# Altium PCB TransceiverBoard.PcbDoc (part 1 of 2)
Units mm, origin at the board's own origin, x right, y up, seen from the top; angles counter-clockwise.
Board outline 152.4 x 101.6 mm, 4 copper layers (Top Layer, Layer 2, Layer 1, Bottom Layer), stack 1.57 mm thick; 106 components, 66 nets, 334 pads, 4 vias.
Unrouted connection lines stored in the file: 243.
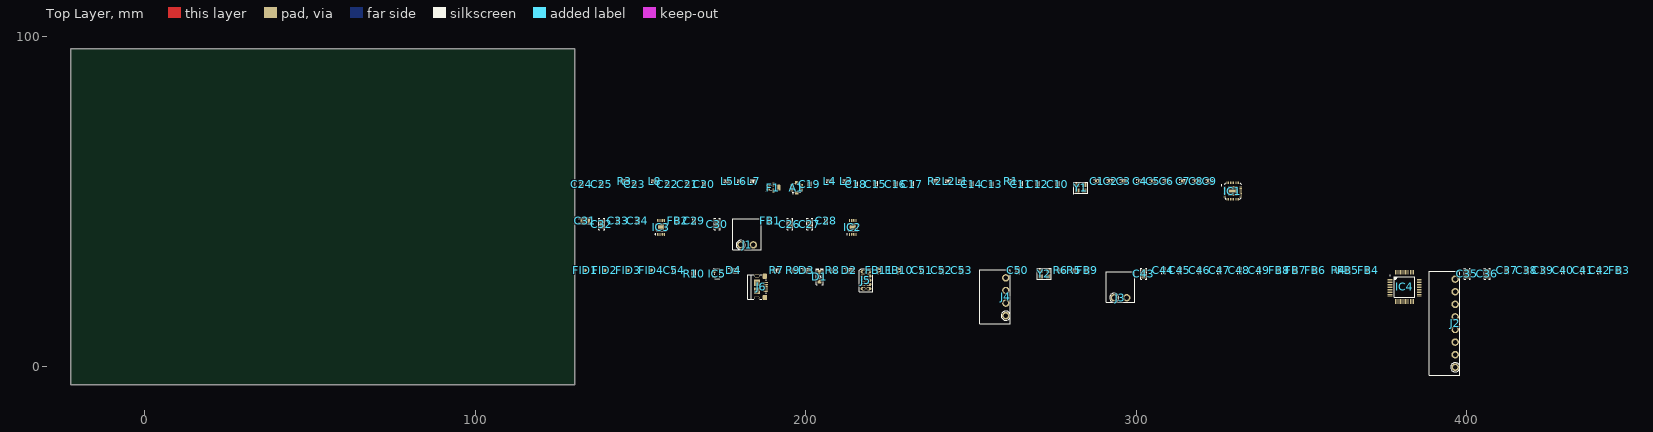
[diagram p0: Top Layer view]
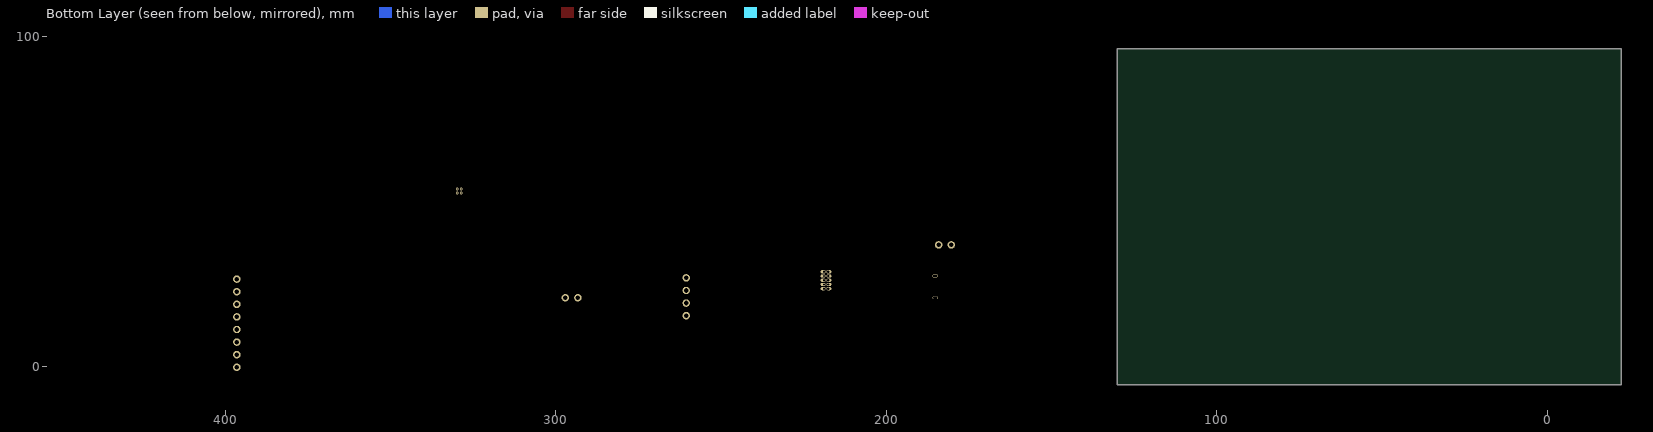
[diagram p1: Bottom Layer view, seen from below]
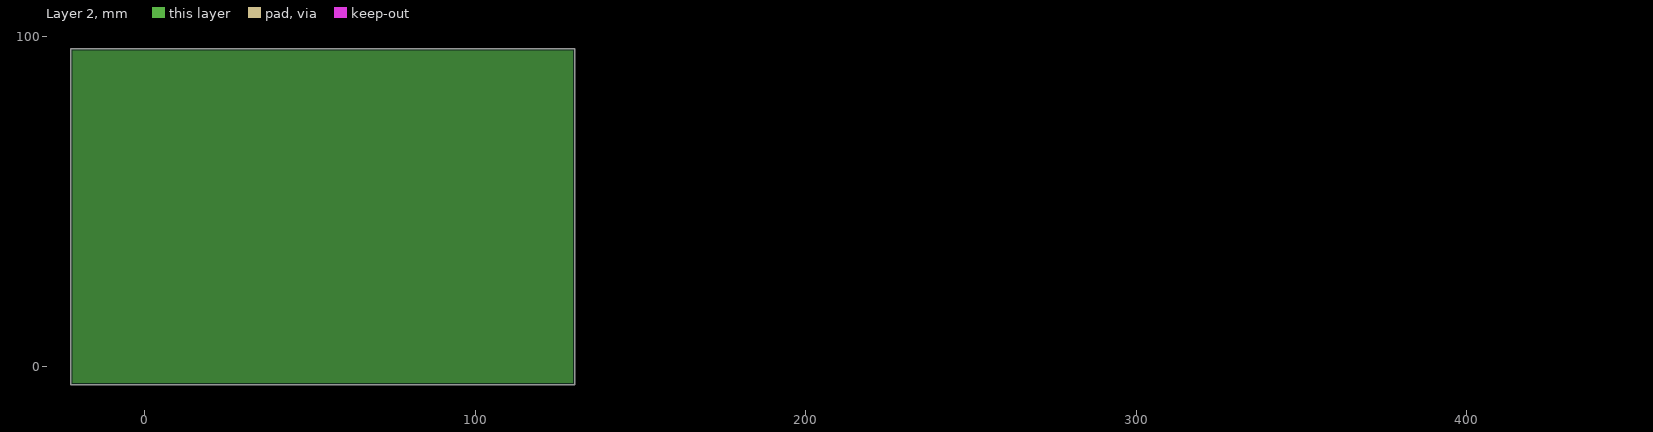
[diagram p2: Layer 2, clearances drawn from the general rule]

## Layer stack, top to bottom
Top Solder: solder mask 0.0127, Solder Resist, Dk 3.8
Top Layer: signal copper 0.035
Dielectric 1: prepreg 0.2, PP-006, Dk 4.6
Layer 2: plane copper 0.0175
Dielectric1: core 1.065, FR-4, Dk 4.8
Layer 1: signal copper 0.0175
Dielectric 2: prepreg 0.2, PP-006, Dk 4.6
Bottom Layer: signal copper 0.035
Bottom Solder: solder mask 0.0127, Solder Resist, Dk 3.8

## Board outline
-22.352,-5.461 130.048,-5.461 130.048,96.139 -22.352,96.139

## Design rules (kind name [scope] priority, off if disabled: settings)
Clearance PadClearance [IsPad vs IsPad] p1: gap=0.2 ignorepadtopadclearanceinfootprint=FALSE except(0: Arc-Hole Track-Hole SMDPad-Hole THPad-Hole Via-Hole Fill-Hole Poly-Hole Region-Hole Text-Hole)
Clearance [All] p2: gap=0.2 ignorepadtopadclearanceinfootprint=FALSE except(0: Arc-Hole Track-Hole SMDPad-Hole THPad-Hole Via-Hole Fill-Hole Poly-Hole Region-Hole Text-Hole)
DiffPairsRouting "DiffPairs LNA" [InDifferentialPair('LNA')] p1: maxlimit=0.201 minlimit=0.2 mostfreqgap=0.2 toplayer_mingap=0.201 toplayer_prefgap=0.201 toplayer_minwidth=0.825 toplayer_maxwidth=0.825 toplayer_prefwidth=0.825 midlayer1_maxgap=0.2 midlayer1_minwidth=0.606 midlayer1_maxwidth=0.606 midlayer1_prefwidth=0.606 bottomlayer_maxgap=0.2 bottomlayer_minwidth=0.825 bottomlayer_maxwidth=0.825 bottomlayer_prefwidth=0.825 impedanceprofiledriven=TRUE impedanceprofileid={68FF9DD3-4D04-4947-82D1-FEB8D34709DA} impedanceprofilevalue=50.000000 maxuncoupledlength=12.7
DiffPairsRouting "DiffPairs USB" [InDifferentialPair('USBD')] p2: maxlimit=0.2 minlimit=0.127 mostfreqgap=0.2 toplayer_mingap=0.2 toplayer_minwidth=0.284 toplayer_maxwidth=0.825 toplayer_prefwidth=0.284 midlayer1_minwidth=0.178 midlayer1_maxwidth=0.606 midlayer1_prefwidth=0.178 bottomlayer_mingap=0.2 bottomlayer_minwidth=0.284 bottomlayer_maxwidth=0.825 bottomlayer_prefwidth=0.284 impedanceprofiledriven=TRUE impedanceprofileid={966B3392-000C-4430-8802-33C250DE2C8B} impedanceprofilevalue=90.000000 maxuncoupledlength=12.7
HoleSize [All] p1: absolutevalues=TRUE maxlimit=6 minlimit=0.4 maxpercent=80.000 minpercent=20.000
HoleToHoleClearance [All] p1: gap=0.2 allowstackedmicrovias=TRUE
MinimumSolderMaskSliver [All] p1: minsoldermaskwidth=0
PlaneClearance [All] p1: clearance=0.508
PlaneConnect [All] p1: planeconnectstyle=Relief reliefexpansion=0.508 reliefentries=4 reliefconductorwidth=0.254 reliefairgap=0.254
PolygonConnect ViaConnect [IsVia] p1: connectstyle=Direct reliefconductorwidth=0.254 reliefentries=4 polygonreliefangle="90 Angle" airgapwidth=0.254
PolygonConnect [All] p2: connectstyle=Direct reliefconductorwidth=0.3 reliefentries=4 polygonreliefangle="90 Angle" airgapwidth=0.254
RoutingVias [All] p1: holewidth=0.6 width=1 viastyle="Through Hole" minholewidth=0.4 minwidth=0.8 maxholewidth=5 maxwidth=6
SilkToSilkClearance [All] p1: silktosilkclearance=0
SilkToSolderMaskClearance SilkscreenOverComponentPads [IsPad] p1: minsilkscreentomaskgap=0.05 clearancetoexposedcopper=TRUE
SolderMaskExpansion "Via Tenting" [IsVia] p1: expansion=-2 istentingtop=FALSE
SolderMaskExpansion [All] p2: expansion=0.102 istentingtop=FALSE
Width "RF Impedance" [InNetClass('RF')] p1: maxlimit=0.335 minlimit=0.254 preferedwidth=0.254 toplayer_minwidth=0.335 toplayer_prefwidth=0.335 impedanceprofiledriven=TRUE impedanceprofileid={E6122DD3-421A-48CC-877E-6B1F2D11767C} impedanceprofilevalue=50.000000 minimp=50.000000 maximp=50.000000 favimp=50.000000
Width [All] p2: maxlimit=2 minlimit=0.2 preferedwidth=0.4
22 further rules are at their usual default settings.

## Classes and differential pairs
net class RF: NetA1_S NetC18_2 NetC19_1 NetC19_2 NetC20_1 NetC20_2 NetC21_2 NetF1_3
component class "RF Module": A1 C1 C2 C3 C4 C5 C6 C7 C8 C9 C10 C11 C12 C13 C14 C15 C16 C17 C18 C19 C20 C21 C22 C23 C24 C25 F1 IC1 L1 L2 L3 L4 L5 L6 L7 L8 R1 R2 R3 Y1
component class Power: C26 C27 C28 C29 C30 C31 C32 C33 C34 FB1 FB2 IC2 IC3 J1
component class Microcontroller: C35 C36 C37 C38 C39 C40 C41 C42 C43 C44 C45 C46 C47 C48 C49 C50 C51 C52 C53 C54 D1 D2 D3 D4 FB3 FB4 FB5 FB6 FB7 FB8 FB9 FB10 FB11 FID1 FID2 FID3 FID4 IC4 IC5 J2 J3 J4 J5 J6 R4 R5 R6 R7 R8 R9 R10 Y2
differential pair USBD: +USBD_P -USBD_N
differential pair LNA: +LNA_P -LNA_N

## Components (designator, comment, footprint, x,y, rotation, side; value= is the part's Value field where it differs from the comment)
A1 "=ManufacturerPartNumber1" "MOLEX SD-734120110" 197.248,54.139 r0 top
C1 "47nF" "CAP 0402/1005" 288.248,56.139 r0 top
C2 "47nF" "CAP 0402/1005" 292.248,56.139 r0 top
C3 "47nF" "CAP 0402/1005" 296.248,56.139 r0 top
C4 "47nF" "CAP 0402/1005" 301.248,56.139 r0 top
C5 "47nF" "CAP 0402/1005" 305.248,56.139 r0 top
C6 "47nF" "CAP 0402/1005" 309.248,56.139 r0 top
C7 "47nF" "CAP 0402/1005" 314.248,56.139 r0 top
C8 "47nF" "CAP 0402/1005" 318.248,56.139 r0 top
C9 "47nF" "CAP 0402/1005" 322.248,56.139 r0 top
C10 "47nF" "CAP 0402/1005" 276.248,55.139 r90 top
C11 "10pF" "CAP 0402/1005" 265.248,55.139 r90 top
C12 "10pF" "CAP 0402/1005" 270.248,55.139 r90 top
C13 "5.1pF" "CAP 0402/1005 RF" 256.248,55.139 r90 top
C14 "1.8nF" "CAP 0402/1005" 250.248,55.139 r90 top
C15 "220nF" "CAP 0402/1005" 221.248,55.139 r90 top
C16 "10nF" "CAP 0402/1005" 227.248,55.139 r90 top
C17 "47nF" "CAP 0402/1005" 232.248,55.139 r90 top
C18 "5.1pF" "CAP 0402/1005 RF" 215.248,55.139 r90 top
C19 "5.1pF" "CAP 0402/1005 RF" 201.248,55.139 r90 top
C20 "39pF" "CAP 0402/1005 RF" 169.248,55.139 r90 top
C21 "6.2pF" "CAP 0402/1005 RF" 164.248,55.139 r90 top
C22 "2.2pF" "CAP 0402/1005 RF" 158.248,55.139 r90 top
C23 "56pF" "CAP 0402/1005 RF" 148.248,55.139 r90 top
C24 "10nF" "CAP 0402/1005 RF" 132.248,55.139 r90 top
C25 "100pF" "CAP 0402/1005 RF" 138.248,55.139 r90 top
C26 "10uF" "CAP 0805/2012" 195.248,43.139 r90 top
C27 "10uF" "CAP 0805/2012" 201.248,43.139 r90 top
C28 "100nF" "CAP 0402/1005" 206.248,44.139 r90 top
C29 "100nF" "CAP 0402/1005" 166.248,44.139 r90 top
C30 "10uF" "CAP 0805/2012" 173.248,43.139 r90 top
C31 "10uF" "CAP 0805/2012" 133.248,44.139 r0 top
C32 "10uF" "CAP 0805/2012" 138.248,43.139 r90 top
C33 "100nF" "CAP 0402/1005" 143.248,44.139 r90 top
C34 "100nF" "CAP 0402/1005" 149.248,44.139 r90 top
C35 "10uF" "CAP 0805/2012" 400.248,28.139 r90 top
C36 "10uF" "CAP 0805/2012" 406.248,28.139 r90 top
C37 "100nF" "CAP 0402/1005" 412.248,29.139 r90 top
C38 "10nF" "CAP 0402/1005" 418.248,29.139 r90 top
C39 "100nF" "CAP 0402/1005" 423.248,29.139 r90 top
C40 "10nF" "CAP 0402/1005" 429.248,29.139 r90 top
C41 "100nF" "CAP 0402/1005" 435.248,29.139 r90 top
C42 "10nF" "CAP 0402/1005" 440.248,29.139 r90 top
C43 "10uF" "CAP 0805/2012" 302.248,28.139 r90 top
C44 "100nF" "CAP 0402/1005" 308.248,29.139 r90 top
C45 "10nF" "CAP 0402/1005" 313.248,29.139 r90 top
C46 "100nF" "CAP 0402/1005" 319.248,29.139 r90 top
C47 "10nF" "CAP 0402/1005" 325.248,29.139 r90 top
C48 "100nF" "CAP 0402/1005" 331.248,29.139 r90 top
C49 "10nF" "CAP 0402/1005" 337.248,29.139 r90 top
C50 "100nF" "CAP 0402/1005" 264.248,29.139 r90 top
C51 "18pF" "CAP 0402/1005" 235.248,29.139 r90 top
C52 "18pF" "CAP 0402/1005" 241.248,29.139 r90 top
C53 "100nF" "CAP 0402/1005" 247.248,29.139 r90 top
C54 "100nF" "CAP 0402/1005" 160.248,29.139 r90 top
D1 "MBR1020VL" SOD123F 204.248,27.139 r90 top
D2 "Green" "LED 0603/1608 GREEN" 213.248,29.139 r0 top
D3 "Blue" "LED 0603/1608 BLUE" 200.248,29.139 r0 top
D4 "Red" "LED 0603/1608 RED" 178.248,29.139 r0 top
F1 "LFCN-490+" "PCB - RF FILTER - MINICIRCUITS FV1206" 190.248,54.139 r0 top
FB1 "=ManufacturerPartNumber1" "FER 0402/1005" 189.248,44.139 r90 top
FB2 "=ManufacturerPartNumber1" "FER 0402/1005" 161.248,44.139 r90 top
FB3 "=ManufacturerPartNumber1" "FER 0402/1005" 446.248,29.139 r90 top
FB4 "=ManufacturerPartNumber1" "FER 0402/1005" 370.248,29.139 r90 top
FB5 "=ManufacturerPartNumber1" "FER 0402/1005" 364.248,29.139 r90 top
FB6 "=ManufacturerPartNumber1" "FER 0402/1005" 354.248,29.139 r90 top
FB7 "=ManufacturerPartNumber1" "FER 0402/1005" 348.248,29.139 r90 top
FB8 "=ManufacturerPartNumber1" "FER 0402/1005" 343.248,29.139 r90 top
FB9 "=ManufacturerPartNumber1" "FER 0402/1005" 285.248,29.139 r90 top
FB10 "=ManufacturerPartNumber1" "FER 0402/1005" 228.248,29.139 r90 top
FB11 "=ManufacturerPartNumber1" "FER 0402/1005" 222.248,29.139 r90 top
FID1 "Fiducial" Fiducial 133.248,29.139 r90 top
FID2 "Fiducial" Fiducial 139.248,29.139 r90 top
FID3 "Fiducial" Fiducial 146.248,29.139 r90 top
FID4 "Fiducial" Fiducial 153.248,29.139 r90 top
IC1 "CC1125" "PCB - LEADLESS - QFN - TI PVQFN-32 5X5MM RHB" 329.248,53.139 r0 top
IC2 "=ManufacturerPartNumber1" "LT MSOP-8 MS8E 3x3MM" 214.248,42.139 r90 top
IC3 "=ManufacturerPartNumber1" "LT MSOP-8 MS8E 3x3MM" 156.248,42.139 r90 top
IC4 "NXP LPC154x LQFP48" "NXP LQFP-48 7x7mm" 381.248,24.139 r0 top
IC5 "PRTR5V0U2X" SOT143B 173.248,28.139 r0 top
J1 "2 Pin" "FCI 06-381-2PIN" 182.248,40.139 r0 top
J2 "8 Pin" "FCI 06-381-8PIN" 393.248,13.139 r90 top
J3 "2 Pin" "FCI 06-381-2PIN" 295.248,24.139 r0 top
J4 "4 Pin" "FCI 06-381-4PIN" 257.248,21.139 r90 top
J5 "SWD" "10 Pin SWD" 218.248,26.139 r0 top
J6 "USB Micro" "FCI USB 10118193-0001LF" 185.248,24.139 r90 top
L1 "27nH" "IND 0402/1005 RF WW" 247.248,56.139 r0 top
L2 "56nH" "IND 0402/1005 RF WW" 243.248,56.139 r0 top
L3 "15nH" "IND 0402/1005 RF WW" 212.248,56.139 r0 top
L4 "27nH" "IND 0402/1005 RF WW" 207.248,56.139 r0 top
L5 "15nH" "IND 0402/1005 RF WW" 176.248,56.139 r0 top
L6 "43nH" "IND 0402/1005 RF WW" 180.248,56.139 r0 top
L7 "22nH" "IND 0402/1005 RF WW" 184.248,56.139 r0 top
L8 "56nH" "IND 0402/1005 RF WW" 154.248,56.139 r0 top
R1 "10kR" "RES 0402/1005" 262.248,56.139 r0 top
R2 "56kR" "RES 0402/1005" 239.248,56.139 r0 top
R3 "18R" "RES 0402/1005" 145.248,56.139 r0 top
R4 "10kR" "RES 0402/1005" 361.248,29.139 r0 top
R5 "10kR" "RES 0402/1005" 281.248,29.139 r0 top
R6 "10kR" "RES 0402/1005" 277.248,29.139 r0 top
R7 "68R" "RES 0402/1005" 191.248,29.139 r0 top
R8 "47R" "RES 0402/1005" 208.248,29.139 r0 top
R9 "150R" "RES 0402/1005" 196.248,29.139 r0 top
R10 "120R" "RES 0402/1005" 166.248,28.139 r90 top
Y1 "32MHz" "ABRACON ABM8G" 283.248,54.139 r0 top
Y2 "12MHz" "ABRACON ABM8G" 272.248,28.139 r0 top

## Footprints (in the part's own frame and the unit in brackets; to place one, negate y for a bottom-side part, rotate by r counter-clockwise, add the part's x,y. Pads: shape width x height; smd on the part's side, far side on the other; paste and mask are expansions set on the pad)
"10 Pin SWD" [mm]
  oval 1.5x1 hole 0.7 copper offset -0.25,0: 1(-0.635,2.54) 3(-0.635,1.27) 5(-0.635,0) 7(-0.635,-1.27) 9(-0.635,-2.54)
  oval 1.5x1 hole 0.7 copper offset 0.25,0: 2(0.635,2.54) 4(0.635,1.27) 6(0.635,0) 8(0.635,-1.27) 10(0.635,-2.54)
  silkscreen extent -2,-3.5 2,3.5
"ABRACON ABM8G" [mm] "Crystal, 4-Leads, Body 2.50x3.20mm, Pitch 2.20mm, IPC Medium Density"
  rect 1.4x1.2 smd: 1(-1.1,-0.85) 2(1.1,-0.85) 3(1.1,0.85) 4(-1.1,0.85)
  silkscreen extent -2.25,-1.85 2.1,1.7, body extent -1.61,-1.26 1.61,1.26, height 0.6
"CAP 0402/1005" [mm] "Chip Capacitor, 2-Leads, Body 1.02x0.51mm, IPC Medium Density"
  rect 0.6x0.64 smd: 1(-0.44,0) 2(0.44,0)
  silkscreen extent -1,-0.5 1,0.5, body extent -0.5,-0.26 0.5,0.26, height 0.52
"CAP 0402/1005 RF" [mm] "Chip Capacitor, 2-Leads, Body 1.02x0.51mm, IPC High Density"
  rect 0.55x0.54 smd: 1(-0.39,0) 2(0.39,0)
  silkscreen extent -0.87,-0.45 0.87,0.45, body extent -0.5,-0.26 0.5,0.26, height 0.52
"CAP 0805/2012" [mm] "Chip Capacitor, 2-Leads, Body 2.00x1.20mm, IPC Medium Density"
  rect 1.3x1.4 smd: 1(-0.8,0) 2(0.8,0)
  silkscreen extent -1.7,-0.9 1.7,0.9, body extent -1,-0.64 1,0.64, height 1.26
"FCI 06-381-2PIN" [mm] "FCI Pluggable Terminal Block"
  round 2.25 hole 1.4: 1(-1.905,-3.302) 2(1.905,-3.302)
  silkscreen extent -4.32,-4.7 4.32,4.57, body extent -4.4,-4.7 4.4,4.5, height 7.6
"FCI 06-381-4PIN" [mm] "FCI Pluggable Terminal Block"
  round 2.25 hole 1.4: 1(-5.715,-3.302) 2(-1.905,-3.302) 3(1.905,-3.302) 4(5.715,-3.302)
  silkscreen extent -8.13,-4.7 8.13,4.57, body extent -8.21,-4.7 8.22,4.5, height 7.6
"FCI 06-381-8PIN" [mm] "FCI Pluggable Terminal Block"
  round 2.25 hole 1.4: 1(-13.335,-3.302) 2(-9.525,-3.302) 3(-5.715,-3.302) 4(-1.905,-3.302) 5(1.905,-3.302) 6(5.715,-3.302) 7(9.525,-3.302) 8(13.335,-3.302)
  silkscreen extent -15.75,-4.7 15.75,4.57, body extent -15.83,-4.7 15.83,4.5, height 7.6
"FCI USB 10118193-0001LF" [mm] "USB 2.0 Type B Micro"
  oval 0.4x1.35 smd: 1(1.3,-2.625) 2(0.65,-2.625) 3(0,-2.625) 4(-0.65,-2.625) 5(-1.3,-2.625)
  oval 0.9x1.6 hole 0.5 slot 1.2 at 90 deg: S(-3.3,0.05) S(3.3,0.05)
  rrect50% 1.6x1.4 smd: S(-3.2,-2.4) S(3.2,-2.4)
  rect 1.9x1.8 smd: S(-1.2,0.05) S(1.2,0.05)
  silkscreen extent -3.7,-2.8 3.7,2.8, body extent -3.93,-2.9 3.93,2.76, height 2.78
"FER 0402/1005" [mm] "Chip Ferrite, 2-Leads, Body 1.02x0.51mm, IPC Medium Density"
  rect 0.6x0.64 smd: 1(-0.44,0) 2(0.44,0)
  silkscreen extent -1,-0.5 1,0.5, body extent -0.5,-0.26 0.5,0.26, height 0.52
Fiducial [mm]
  round 1 smd paste-1 mask+0.5: F(0,0)
"IND 0402/1005 RF WW" [mm] "Chip Inductor, 2-Leads, Body 1.00x0.50mm, IPC High Density"
  rect 0.48x0.54 smd: 1(-0.44,0) 2(0.44,0)
  silkscreen extent -0.87,-0.45 0.87,0.45, body extent -0.5,-0.29 0.5,0.29, height 0.51
"LED 0603/1608 BLUE" [mm] "Chip Diode, 2-Leads, Body 1.60x0.80mm, IPC Medium Density"
  rect 0.8x0.8 smd: 1(-0.75,0) 2(0.75,0)
  silkscreen extent -1.52,-0.7 1.52,0.7, body extent -0.8,-0.4 0.8,0.4, height 0.53
"LED 0603/1608 GREEN" [mm] "Chip Diode, 2-Leads, Body 1.60x0.80mm, IPC Medium Density"
  rect 0.8x0.8 smd: 1(-0.75,0) 2(0.75,0)
  silkscreen extent -1.52,-0.7 1.52,0.7, body extent -0.8,-0.4 0.8,0.4, height 0.53
"LED 0603/1608 RED" [mm] "Chip Diode, 2-Leads, Body 1.60x0.80mm, IPC Medium Density"
  rect 0.8x0.8 smd: 1(-0.75,0) 2(0.75,0)
  silkscreen extent -1.52,-0.7 1.52,0.7, body extent -0.8,-0.4 0.8,0.4, height 0.53
"LT MSOP-8 MS8E 3x3MM" [mm] "MSOP, 8-Leads, Body 3.00x3.00mm, Pitch 0.65mm, IPC Medium Density"
  oval 0.89x0.42 smd: 1(-2.105,0.975) 2(-2.105,0.325) 3(-2.105,-0.325) 4(-2.105,-0.975) 5(2.105,-0.975) 6(2.105,-0.325) 7(2.105,0.325) 8(2.105,0.975)
  rrect50% 1.68x1.88 smd: 9(0,0)
  silkscreen extent -2.23,-1.55 1.15,1.86, body extent -2.46,-1.5 2.46,1.5, height 0.96
"MOLEX SD-734120110" [mm]
  rect 1.05x2.2 smd: G(-1.475,0) G(1.475,0)
  rect 1x1 smd: G(0,1.5) S(0,-1.5)
  silkscreen extent -1.3,-1.8 1.3,1.3, body extent -1.5,-1.54 1.5,1.54, height 1.3
"NXP LQFP-48 7x7mm" [mm] "LQFP, 48-Leads, Body 7.00x7.00mm, Pitch 0.50mm, IPC Medium Density"
  oval 1.5x0.28 smd: 1(-4.425,2.75) 2(-4.425,2.25) 3(-4.425,1.75) 4(-4.425,1.25) 5(-4.425,0.75) 6(-4.425,0.25) 7(-4.425,-0.25) 8(-4.425,-0.75) 9(-4.425,-1.25) 10(-4.425,-1.75) 11(-4.425,-2.25) 12(-4.425,-2.75) 25(4.425,-2.75) 26(4.425,-2.25) 27(4.425,-1.75) 28(4.425,-1.25) 29(4.425,-0.75) 30(4.425,-0.25) 31(4.425,0.25) 32(4.425,0.75) 33(4.425,1.25) 34(4.425,1.75) 35(4.425,2.25) 36(4.425,2.75)
  oval 0.28x1.5 smd: 13(-2.75,-4.425) 14(-2.25,-4.425) 15(-1.75,-4.425) 16(-1.25,-4.425) 17(-0.75,-4.425) 18(-0.25,-4.425) 19(0.25,-4.425) 20(0.75,-4.425) 21(1.25,-4.425) 22(1.75,-4.425) 23(2.25,-4.425) 24(2.75,-4.425) 37(2.75,4.425) 38(2.25,4.425) 39(1.75,4.425) 40(1.25,4.425) 41(0.75,4.425) 42(0.25,4.425) 43(-0.25,4.425) 44(-0.75,4.425) 45(-1.25,4.425) 46(-1.75,4.425) 47(-2.25,4.425) 48(-2.75,4.425)
  silkscreen extent -4.55,-3.1 3.1,3.56, body extent -4.51,-4.51 4.51,4.51, height 1.55
"PCB - LEADLESS - QFN - TI PVQFN-32 5X5MM RHB" [mm] "PVQFN, 32-Leads, Body 5.1x5.1mm (max), Pitch 0.50mm, IPC Medium Density"
  oval 0.8x0.25 smd: 1(-2.45,1.75) 2(-2.45,1.25) 3(-2.45,0.75) 4(-2.45,0.25) 5(-2.45,-0.25) 6(-2.45,-0.75) 7(-2.45,-1.25) 8(-2.45,-1.75) 17(2.45,-1.75) 18(2.45,-1.25) 19(2.45,-0.75) 20(2.45,-0.25) 21(2.45,0.25) 22(2.45,0.75) 23(2.45,1.25) 24(2.45,1.75)
  oval 0.25x0.8 smd: 9(-1.75,-2.45) 10(-1.25,-2.45) 11(-0.75,-2.45) 12(-0.25,-2.45) 13(0.25,-2.45) 14(0.75,-2.45) 15(1.25,-2.45) 16(1.75,-2.45) 25(1.75,2.45) 26(1.25,2.45) 27(0.75,2.45) 28(0.25,2.45) 29(-0.25,2.45) 30(-0.75,2.45) 31(-1.25,2.45) 32(-1.75,2.45)
  rect 3x3 smd: 33(0,0)
  silkscreen extent -3.52,-2.5 2.5,2.5, body extent -2.5,-2.5 2.51,2.51, height 0.89
"PCB - RF FILTER - MINICIRCUITS FV1206" [mm] "Ceramic Filter 1206 case 4PC pin"
  rrect25% 1.04x1.8 smd: 1(-1.625,0) 3(1.625,0)
  rrect25% 0.61x1.245 smd: 2(0,-0.927) 4(0,0.927)
  silkscreen extent -2.4,-1.25 0.8,0.8, body extent -1.61,-0.81 1.61,0.81, height 0.94
"RES 0402/1005" [mm] "Chip Resistor, 2-Leads, Body 1.0x0.5mm, IPC Medium Density"
  rect 0.75x0.6 smd: 1(-0.575,0) 2(0.575,0)
  silkscreen extent -1.14,-0.51 1.14,0.51, body extent -0.5,-0.25 0.5,0.25, height 0.35
SOD123F [mm] "SODFL, 2-Leads, Body 1.60x3.50mm, IPC Medium Density"
  rect 1.2x1.2 smd: 1(-1.43,0) 2(1.43,0)
  silkscreen extent -2.41,-1.02 2.41,1.02, body extent -1.75,-0.8 1.75,0.8, height 1.1
SOT143B [mm] "SOT143, 4-Leads, Body 2.90x2.30mm, Pitch 1.90mm, IPC Medium Density"
  rect 1.15x1 smd: 1(-1.075,0.75)
  rect 1.15x0.6 smd: 2(-1.075,-0.95) 3(1.075,-0.95) 4(1.075,0.95)
  silkscreen extent -1.12,-1.5 0.7,1.6, body extent -1.1,-1.45 1.1,1.45, height 1

## Part data
A1: library part "Basic Antenna", "Conn Micro Coaxial RCP 0Hz to 6GHz 50Ohm Solder ST SMD Gold Embossed T/R", Dielectric Material=Polymer, Frequency=6Hz, Housing Color=Silver, Manufacturer 1=Molex, Manufacturer Part Number 1=0734120110, Max Frequency=6GHz, Max Operating Temperature=90°C, Min Operating Temperature=-40°C, Package Quantity=1, Supplier Part Number 1=WM5587TR-ND, Voltage Rating=60V, Body Material=Bronze, Body Plating=Nickel, Category="RF / Coaxial Connectors", ComponentLink1Description=https://datasheet.ciiva.com/7002/734120110-sd-7002502.pdf?src-supplier=Digi-Key, ComponentLink1URL=https://datasheet.ciiva.com/7002/734120110-sd-7002502.pdf?src-supplier=Digi-Key, ComponentLink2Description=https://datasheet.ciiva.com/7002/734120110-sd-7002507.pdf?src-supplier=Digi-Key, ComponentLink2URL=https://datasheet.ciiva.com/7002/734120110-sd-7002507.pdf?src-supplier=Digi-Key, Connector Type="Coaxial,Male Pin", Contact Material=Brass,Bronze, Contact Plating=Gold, Depth=3mm, Fastening Type=Snap, Impedance=50R, Insulation Material=Polymer, Length=3mm, Mount="Surface Mount", Packaging="Tape and Reel", Pricing 1="5000=0.317120, 10000=0.295250, 15000=0.290870, 25000=0.284310 (USD)", Radiation Hardening=No, RoHS=Yes, Stock 1=65000, Supplier 1=Digi-Key, Termination=Solder
C1 C2 C3 C4 C5 C6 C7 C8 C9 C10 C17: library part Capacitor, "CAP CER 0.047UF 10V X7R 0402", Case Code (Imperial)=0402, Case Code (Metric)=1005, Dielectric=X7R, Manufacturer 1=Yageo, Manufacturer Part Number 1=CC0402KRX7R6BB473, Max Operating Temperature=125°C, Min Operating Temperature=-55°C, Package Quantity=1, Supplier Part Number 1=311-1334-1-ND, Tolerance=10%, Voltage=16V, Voltage Rating=10V, Capacitance=47nF, Case/Package=0402, Category="Ceramic Capacitors", ComponentLink1Description=https://datasheet.ciiva.com/11788/0900766b80d84f1d-11788423.pdf?src-supplier=RSComponents, ComponentLink1URL=https://datasheet.ciiva.com/11788/0900766b80d84f1d-11788423.pdf?src-supplier=RSComponents, ComponentLink2Description=https://datasheet.ciiva.com/144/mlccorderingcode-144049.pdf?src-supplier=Digi-Key, ComponentLink2URL=https://datasheet.ciiva.com/144/mlccorderingcode-144049.pdf?src-supplier=Digi-Key, ComponentLink3Description=https://datasheet.ciiva.com/144/mlccorderingcode-144050.pdf?src-supplier=Digi-Key, ComponentLink3URL=https://datasheet.ciiva.com/144/mlccorderingcode-144050.pdf?src-supplier=Digi-Key, ComponentLink4Description=https://datasheet.ciiva.com/144/mlccorderingcode-144051.pdf?src-supplier=Digi-Key, ComponentLink4URL=https://datasheet.ciiva.com/144/mlccorderingcode-144051.pdf?src-supplier=Digi-Key, ComponentLink5Description=https://datasheet.ciiva.com/7978/1489800-7978104.pdf?src-supplier=Element14, ComponentLink5URL=https://datasheet.ciiva.com/7978/1489800-7978104.pdf?src-supplier=Element14, ComponentLink6Description=https://datasheet.ciiva.com/11587/upy-gphc-x7r-6-3v-to-50v-8-11587304.pdf?src-supplier=Avnet, ComponentLink6URL=https://datasheet.ciiva.com/11587/upy-gphc-x7r-6-3v-to-50v-8-11587304.pdf?src-supplier=Avnet, Composition=Ceramic, Depth=0.5mm, Halogen Free="Halogen Free", Height=0.5mm, Lead Free="Lead Free", Length=1mm, Mount="Surface Mount", Number of Pins=2, Packaging="Tape and Reel", Pricing 1="1=0.10000, 10=0.02500, 100=0.01100, 500=0.00784, 1000=0.00616, 2500=0.00560, 5000=0.00515 (USD)", Radiation Hardening=No, REACH SVHC=Unknown, RoHS=Yes, Stock 1=121390, Supplier 1=Digi-Key, Termination=SMD/SMT, Thickness=0.022inch, Voltage Rating (DC)=10V, Width=0.5mm
C11 C12: library part Capacitor, "CAP CER 10PF 50V C0G/NPO 0402", Case Code (Imperial)=0402, Case Code (Metric)=1005, Dielectric=C0G, Dielectric Material=Ceramic, Insulation Resistance=100GR, Manufacturer 1=Yageo, Manufacturer Part Number 1=CC0402JRNPO9BN100, Max Operating Temperature=125°C, Min Operating Temperature=-55°C, Package Quantity=1, Supplier Part Number 1=311-1014-1-ND, Temperature Coefficient=30ppm/°C, Tolerance=5%, Voltage=50V, Capacitance=10pF, Case/Package=0402, Category="Ceramic Capacitors", ComponentLink10Description=https://datasheet.ciiva.com/5427/upy-gp-np0-16v-to-50v-8-5427741.pdf?src-supplier=Mouser, ComponentLink10URL=https://datasheet.ciiva.com/5427/upy-gp-np0-16v-to-50v-8-5427741.pdf?src-supplier=Mouser, ComponentLink1Description=https://datasheet.ciiva.com/11786/0900766b8079c870-11786158.pdf?src-supplier=RSComponents, ComponentLink1URL=https://datasheet.ciiva.com/11786/0900766b8079c870-11786158.pdf?src-supplier=RSComponents, ComponentLink2Description=https://datasheet.ciiva.com/28450/1443161-28450213.pdf?src-supplier=Element14, ComponentLink2URL=https://datasheet.ciiva.com/28450/1443161-28450213.pdf?src-supplier=Element14, ComponentLink3Description=https://datasheet.ciiva.com/8033/1443161-8033591.pdf?src-supplier=Element14, ComponentLink3URL=https://datasheet.ciiva.com/8033/1443161-8033591.pdf?src-supplier=Element14, ComponentLink4Description=https://datasheet.ciiva.com/143/mlccorderingcode-143992.pdf?src-supplier=Digi-Key, ComponentLink4URL=https://datasheet.ciiva.com/143/mlccorderingcode-143992.pdf?src-supplier=Digi-Key, ComponentLink5Description=https://datasheet.ciiva.com/143/mlccorderingcode-143994.pdf?src-supplier=Digi-Key, ComponentLink5URL=https://datasheet.ciiva.com/143/mlccorderingcode-143994.pdf?src-supplier=Digi-Key, ComponentLink6Description=https://datasheet.ciiva.com/8033/1443161-8033596.pdf?src-supplier=Element14, ComponentLink6URL=https://datasheet.ciiva.com/8033/1443161-8033596.pdf?src-supplier=Element14, ComponentLink7Description=https://datasheet.ciiva.com/17437/upy-gp-np0-16v-to-50v-8-17437543.pdf?src-supplier=Avnet+Europe, ComponentLink7URL=https://datasheet.ciiva.com/17437/upy-gp-np0-16v-to-50v-8-17437543.pdf?src-supplier=Avnet+Europe, ComponentLink8Description=https://datasheet.ciiva.com/143/mlccorderingcode-143993.pdf?src-supplier=Digi-Key, ComponentLink8URL=https://datasheet.ciiva.com/143/mlccorderingcode-143993.pdf?src-supplier=Digi-Key, ComponentLink9Description=https://datasheet.ciiva.com/8033/1443161-8033593.pdf?src-supplier=Element14, ComponentLink9URL=https://datasheet.ciiva.com/8033/1443161-8033593.pdf?src-supplier=Element14, Composition=Ceramic, Depth=0.5mm, Height=0.5mm, Lead Free="Lead Free", Length=1mm, Mount="Surface Mount", Number of Pins=2, Packaging="Tape and Reel", Pricing 1="1=0.10000, 10=0.02800, 100=0.01230, 500=0.00878, 1000=0.00690, 2500=0.00628, 5000=0.00577 (USD)", Radiation Hardening=No, REACH SVHC="No SVHC", RoHS=Yes, Stock 1=1186868, Supplier 1=Digi-Key, Termination=SMD/SMT, Thickness=0.022inch, Voltage Rating=50V, Voltage Rating (DC)=50V, Width=0.02inch
C13 C18 C19: library part Capacitor, "CAP CER 5.1PF 50V C0G/NP0 0402", Case Code (Imperial)=0402, Case Code (Metric)=1005, Dielectric=C0G, Manufacturer 1=Murata, Manufacturer Part Number 1=GJM1555C1H5R1CB01D, Max Operating Temperature=125°C, Min Operating Temperature=-55°C, Package Quantity=1, Supplier Part Number 1=490-3102-1-ND, Voltage=50V, Capacitance=5.1pF, Case/Package=0402, Category="Ceramic Capacitors", ComponentLink1Description=https://datasheet.ciiva.com/11612/product-11612657.pdf?src-supplier=Avnet, ComponentLink1URL=https://datasheet.ciiva.com/11612/product-11612657.pdf?src-supplier=Avnet, ComponentLink2Description=https://datasheet.ciiva.com/133/partnumbering-e-01-133114.pdf?src-supplier=Digi-Key, ComponentLink2URL=https://datasheet.ciiva.com/133/partnumbering-e-01-133114.pdf?src-supplier=Digi-Key, ComponentLink3Description=https://datasheet.ciiva.com/133/partnumbering-e-01-133115.pdf?src-supplier=Digi-Key, ComponentLink3URL=https://datasheet.ciiva.com/133/partnumbering-e-01-133115.pdf?src-supplier=Digi-Key, ComponentLink4Description=https://datasheet.ciiva.com/133/partnumbering-e-01-133116.pdf?src-supplier=Digi-Key, ComponentLink4URL=https://datasheet.ciiva.com/133/partnumbering-e-01-133116.pdf?src-supplier=Digi-Key, Depth=0.5mm, Height=0.5mm, Lead Free="Lead Free", Length=1mm, Mount="Surface Mount", Packaging="Tape and Reel", Pricing 1="1=0.12000, 10=0.08200, 100=0.03850, 500=0.02700, 1000=0.02236, 2500=0.02081, 5000=0.01904 (USD)", Radiation Hardening=No, RoHS=Yes, Stock 1=188020, Supplier 1=Digi-Key, Termination=SMD/SMT, Thickness=0.022inch, Voltage Rating=50V, Voltage Rating (DC)=50V, Width=0.02inch
C14: library part Capacitor, "CAP CER 1800PF 50V X7R 0402", Case Code (Imperial)=0402, Case Code (Metric)=1005, Manufacturer 1=Murata, Manufacturer Part Number 1=GCM155R71H182KA37D, Max Operating Temperature=125°C, Min Operating Temperature=-55°C, Ratings=AEC-Q200, Supplier Part Number 1=490-14429-1-ND, Tolerance=10%, Voltage Rating=50V, Capacitance=1.8nF, Case/Package=0402, Category="Ceramic Capacitors", ComponentLink1Description=http://search.murata.co.jp/Ceramy/image/img/A01X/partnumbering_e_02.pdf?src-supplier=Digi-Key, ComponentLink1URL=http://search.murata.co.jp/Ceramy/image/img/A01X/partnumbering_e_02.pdf?src-supplier=Digi-Key, ComponentLink2Description=http://search.murata.co.jp/Ceramy/image/img/A01X/G101/ENG/GCM155R71H182KA37-01.pdf?src-supplier=Digi-Key, ComponentLink2URL=http://search.murata.co.jp/Ceramy/image/img/A01X/G101/ENG/GCM155R71H182KA37-01.pdf?src-supplier=Digi-Key, Mount="Surface Mount", Packaging="Cut Tape", Pricing 1="1=0.10000, 10=0.03200, 100=0.01430, 500=0.01022, 1000=0.00803, 2500=0.00730, 5000=0.00671 (USD)", RoHS=No, Stock 1=49462, Supplier 1=Digi-Key
C15: library part Capacitor, "Cap Ceramic 0.22uF 10V X7R 10% SMD 0402 125C Paper T/R", Case Code (Imperial)=0402, Case Code (Metric)=1005, Dielectric=X7R, Manufacturer 1=Samsung, Manufacturer Part Number 1=CL05B224KP5NNNC, Max Operating Temperature=125°C, Min Operating Temperature=-55°C, Package Quantity=1, Supplier Part Number 1=1276-1539-1-ND, Tolerance=10%, Voltage Rating=10V, Capacitance=220nF, Case/Package=0402, Category="Ceramic Capacitors", ComponentLink1Description=https://datasheet.ciiva.com/25733/cl05b224kp5nnnc-25733649.pdf?src-supplier=Digi-Key, ComponentLink1URL=https://datasheet.ciiva.com/25733/cl05b224kp5nnnc-25733649.pdf?src-supplier=Digi-Key, ComponentLink2Description=https://datasheet.ciiva.com/26838/getdatasheetpartid-455373-26838229.pdf?src-supplier=Verical, ComponentLink2URL=https://datasheet.ciiva.com/26838/getdatasheetpartid-455373-26838229.pdf?src-supplier=Verical, Depth=0.5mm, Height=0.5mm, Lead Free="Lead Free", Length=1mm, Mount="Surface Mount", Packaging="Tape and Reel", Pricing 1="1=0.10000, 10=0.05000, 100=0.02210, 500=0.01576, 1000=0.01238, 2500=0.01125, 5000=0.01035 (USD)", Radiation Hardening=No, RoHS=Yes, Stock 1=360286, Supplier 1=Digi-Key, Thickness=0.022inch, Voltage Rating (DC)=10V, Width=0.02inch
C16 C38 C40 C42 C45 C47 C49: library part Capacitor, "TAIYO YUDEN - TMK105B7103KV-F - CERAMIC CAPACITOR 0.01UF, 25V, X7R, 10%, 0402, FULL REEL", Case Code (Imperial)=0402, Case Code (Metric)=1005, Dielectric=X7R, Manufacturer 1="Taiyo Yuden", Manufacturer Part Number 1=TMK105B7103KV-F, Max Operating Temperature=125°C, Min Operating Temperature=-55°C, Package Quantity=1, Supplier Part Number 1=587-1223-1-ND, Tolerance=10%, Voltage=25V, Capacitance=10nF, Case/Package=0402, Category="Ceramic Capacitors", ComponentLink1Description=https://datasheet.ciiva.com/129/tmk105b7103kv-f-ss-129699.pdf?src-supplier=Digi-Key, ComponentLink1URL=https://datasheet.ciiva.com/129/tmk105b7103kv-f-ss-129699.pdf?src-supplier=Digi-Key, ComponentLink2Description=https://datasheet.ciiva.com/30192/438tmk105b7103kv-f-30192315.pdf?src-supplier=Onlinecomponents.com, ComponentLink2URL=https://datasheet.ciiva.com/30192/438tmk105b7103kv-f-30192315.pdf?src-supplier=Onlinecomponents.com, ComponentLink3Description=https://datasheet.ciiva.com/15922/204tmk105b7103kv-f-15922348.pdf?src-supplier=Onlinecomponents.com, ComponentLink3URL=https://datasheet.ciiva.com/15922/204tmk105b7103kv-f-15922348.pdf?src-supplier=Onlinecomponents.com, ComponentLink4Description=https://datasheet.ciiva.com/30156/190tmk105b7103kv-f-30156174.pdf?src-supplier=Onlinecomponents.com, ComponentLink4URL=https://datasheet.ciiva.com/30156/190tmk105b7103kv-f-30156174.pdf?src-supplier=Onlinecomponents.com, ComponentLink5Description=https://datasheet.ciiva.com/7975/746258-7975835.pdf?src-supplier=Element14, ComponentLink5URL=https://datasheet.ciiva.com/7975/746258-7975835.pdf?src-supplier=Element14, ComponentLink6Description=https://datasheet.ciiva.com/28645/746258-28645254.pdf?src-supplier=Element14, ComponentLink6URL=https://datasheet.ciiva.com/28645/746258-28645254.pdf?src-supplier=Element14, Composition=Ceramic, Contact Plating=Tin, Depth=0.5mm, Halogen Free="Halogen Free", Height=0.5mm, Length=1mm, Mount="Surface Mount", Packaging="Tape and Reel", Pricing 1="1=0.10000, 10=0.01700, 100=0.00780, 500=0.00554, 1000=0.00436, 2500=0.00396, 5000=0.00364 (USD)", REACH SVHC=Unknown, RoHS=Yes, Stock 1=1448575, Supplier 1=Digi-Key, Termination=SMD/SMT, Thickness=0.022inch, Voltage Rating=25V, Voltage Rating (DC)=25V, Width=0.02inch
C20: library part Capacitor, "KEMET         CBR04C390J5GAC             CAPACITOR, RF, 39PF, 50V, 0402                          New", Case Code (Imperial)=0402, Case Code (Metric)=1005, Manufacturer 1=KEMET, Manufacturer Part Number 1=CBR04C390J5GAC, Max Operating Temperature=125°C, Supplier Part Number 1=399-17685-1-ND, Tolerance=5%, Voltage Rating=50V, Capacitance=39pF, Case/Package=0402, ComponentLink1Description=http://www.farnell.com/datasheets/1446011.pdf?src-supplier=Element14, ComponentLink1URL=http://www.farnell.com/datasheets/1446011.pdf?src-supplier=Element14, Packaging="Cut Tape", Pricing 1="1=0.27000, 10=0.18500, 100=0.09380, 500=0.06414, 1000=0.05675, 2500=0.05428, 5000=0.04935 (USD)", REACH SVHC="No SVHC", RoHS=No, Stock 1=23180, Supplier 1=Digi-Key, Voltage Rating (DC)=50V
C21: library part Capacitor, "KEMET         CBR04C629B5GAC             CAPACITOR, RF, 6.2PF, 50V, 0402                          New", Case Code (Imperial)=0402, Case Code (Metric)=1005, Manufacturer 1=KEMET, Manufacturer Part Number 1=CBR04C629B5GAC, Max Operating Temperature=125°C, Supplier Part Number 1=399-16105-1-ND, Voltage Rating=50V, Capacitance=6.2pF, Case/Package=0402, Category="Ceramic Capacitors", ComponentLink1Description=https://api.kemet.com/component-edge/download/datasheet/CBR04C629B5GAC.pdf?src-supplier=Digi-Key, ComponentLink1URL=https://api.kemet.com/component-edge/download/datasheet/CBR04C629B5GAC.pdf?src-supplier=Digi-Key, ComponentLink2Description=http://www.farnell.com/datasheets/1446011.pdf?src-supplier=Element14, ComponentLink2URL=http://www.farnell.com/datasheets/1446011.pdf?src-supplier=Element14, Packaging="Cut Tape", Pricing 1="1=0.20000, 10=0.13600, 100=0.06880, 500=0.04704, 1000=0.04162, 2500=0.03981, 5000=0.03619 (USD)", REACH SVHC="No SVHC", RoHS=No, Stock 1=6814, Supplier 1=Digi-Key, Voltage Rating (DC)=50V
C22: library part Capacitor, "KEMET 2.2pF Multilayer Ceramic Capacitor (MLCC) 50 V dc 0.25pF C0G dielectric C, CBR SMD max op. temp. +125C", Case Code (Imperial)=0402, Case Code (Metric)=1005, Dielectric=C0G, Dielectric Material=Ceramic, Manufacturer 1=KEMET, Manufacturer Part Number 1=CBR04C229C5GAC, Max Operating Temperature=125°C, Min Operating Temperature=-55°C, Package Quantity=1, Supplier Part Number 1=399-6164-1-ND, Temperature Coefficient=30ppm/°C, Voltage=50V, Capacitance=2.2pF, Case/Package=0402, Category="Ceramic Capacitors", ComponentLink1Description=https://datasheet.ciiva.com/22826/0900766b81140870-22826295.pdf?src-supplier=RSComponents, ComponentLink1URL=https://datasheet.ciiva.com/22826/0900766b81140870-22826295.pdf?src-supplier=RSComponents, ComponentLink2Description=https://datasheet.ciiva.com/156/kem-c1030-cbr-smd-156418.pdf?src-supplier=Digi-Key, ComponentLink2URL=https://datasheet.ciiva.com/156/kem-c1030-cbr-smd-156418.pdf?src-supplier=Digi-Key, ComponentLink3Description=https://datasheet.ciiva.com/156/kem-c1030-cbr-smd-156419.pdf?src-supplier=Digi-Key, ComponentLink3URL=https://datasheet.ciiva.com/156/kem-c1030-cbr-smd-156419.pdf?src-supplier=Digi-Key, ComponentLink4Description=https://datasheet.ciiva.com/156/kem-c1030-cbr-smd-156420.pdf?src-supplier=Digi-Key, ComponentLink4URL=https://datasheet.ciiva.com/156/kem-c1030-cbr-smd-156420.pdf?src-supplier=Digi-Key, ComponentLink5Description=https://datasheet.ciiva.com/22694/1446011-22694698.pdf?src-supplier=Element14, ComponentLink5URL=https://datasheet.ciiva.com/22694/1446011-22694698.pdf?src-supplier=Element14, ComponentLink6Description=https://datasheet.ciiva.com/1461/1446011-1461900.pdf?src-supplier=Element14, ComponentLink6URL=https://datasheet.ciiva.com/1461/1446011-1461900.pdf?src-supplier=Element14, Depth=0.5mm, Height=0.5mm, Length=1mm, Mount="Surface Mount", Packaging="Tape and Reel", Pricing 1="1=0.15000, 10=0.10700, 100=0.05010, 500=0.03512, 1000=0.02908, 2500=0.02706, 5000=0.02476 (USD)", Radiation Hardening=No, REACH SVHC="No SVHC", RoHS=Yes, Stock 1=8531, Supplier 1=Digi-Key, Termination=SMD/SMT, Thickness=0.022inch, Voltage Rating=50V, Voltage Rating (DC)=50V, Weight=2.3E-05oz, Width=0.02inch
C23: library part Capacitor, "Cap Ceramic 56pF 50V C0G 1% SMD 0402 125°C Paper T/R", Case Code (Imperial)=0402, Case Code (Metric)=1005, Dielectric=C0G, Manufacturer 1=KEMET, Manufacturer Part Number 1=CBR04C560F5GAC, Max Operating Temperature=125°C, Min Operating Temperature=-55°C, Package Quantity=10000, Supplier Part Number 1=399-16100-1-ND, Tolerance=1%, Voltage Rating (DC)=50V, Capacitance=56pF, Case/Package=0402, Category="Ceramic Capacitors", ComponentLink1Description=http://www.farnell.com/datasheets/2373108.pdf?src-supplier=Farnell, ComponentLink1URL=http://www.farnell.com/datasheets/2373108.pdf?src-supplier=Farnell, ComponentLink2Description=http://www.mouser.com/ds/2/212/KEM_C1030_CBR_SMD-346920.pdf?src-supplier=Mouser, ComponentLink2URL=http://www.mouser.com/ds/2/212/KEM_C1030_CBR_SMD-346920.pdf?src-supplier=Mouser, ComponentLink3Description=https://api.kemet.com/component-edge/download/datasheet/CBR04C560F5GAC.pdf?src-supplier=Digi-Key, ComponentLink3URL=https://api.kemet.com/component-edge/download/datasheet/CBR04C560F5GAC.pdf?src-supplier=Digi-Key, Height=0.5mm, Length=1mm, Packaging="Tape and Reel", Pricing 1="1=0.55000, 10=0.39100, 100=0.25740, 500=0.19068, 1000=0.16208, 2500=0.15254, 5000=0.14301 (USD)", RoHS=Yes, Stock 1=28423, Supplier 1=Digi-Key, Termination=SMD/SMT, Weight=2.3E-05oz, Width=0.5mm
C24: library part Capacitor, "Cap Ceramic 0.01uF 16V X7R 5% SMD 0402 125C Paper T/R", Case Code (Imperial)=0402, Case Code (Metric)=1005, Dielectric=X7R, Manufacturer 1=Samsung, Manufacturer Part Number 1=CL05B103JO5NNNC, Max Operating Temperature=125°C, Min Operating Temperature=-55°C, Package Quantity=10000, Supplier Part Number 1=1276-1496-1-ND, Tolerance=5%, Voltage Rating=16V, Capacitance=10nF, Case/Package=0402, Category="Ceramic Capacitors", ComponentLink1Description=https://datasheet.ciiva.com/25738/cl05b103jo5nnnc-25738915.pdf?src-supplier=Digi-Key, ComponentLink1URL=https://datasheet.ciiva.com/25738/cl05b103jo5nnnc-25738915.pdf?src-supplier=Digi-Key, ComponentLink2Description=https://datasheet.ciiva.com/26822/getdatasheetpartid-357639-26822697.pdf?src-supplier=Verical, ComponentLink2URL=https://datasheet.ciiva.com/26822/getdatasheetpartid-357639-26822697.pdf?src-supplier=Verical, Depth=0.5mm, Height=0.5mm, Length=1mm, Mount="Surface Mount", Packaging="Tape and Reel", Pricing 1="1=0.10000, 10=0.02700, 100=0.01190, 500=0.00848, 1000=0.00666, 2500=0.00605, 5000=0.00557 (USD)", Radiation Hardening=No, RoHS=Yes, Stock 1=288059, Supplier 1=Digi-Key, Thickness=0.022inch, Voltage Rating (DC)=16V, Width=0.02inch
C25: library part Capacitor, "CAP CER SMD CBR 0402 100PF 5% 25", Case Code (Imperial)=0402, Case Code (Metric)=1005, Manufacturer 1=KEMET, Manufacturer Part Number 1=CBR04C101J3GAC, Max Operating Temperature=125°C, Min Operating Temperature=-55°C, Supplier Part Number 1=399-17684-1-ND, Tolerance=5%, Voltage Rating=25V, Capacitance=100pF, Case/Package=0402, ComponentLink1Description=https://api.kemet.com/component-edge/download/datasheet/CBR04C101J3GAC.pdf?src-supplier=Digi-Key, ComponentLink1URL=https://api.kemet.com/component-edge/download/datasheet/CBR04C101J3GAC.pdf?src-supplier=Digi-Key, Mount="Surface Mount", Packaging="Cut Tape", Pricing 1="1=0.25000, 10=0.16800, 100=0.08520, 500=0.05832, 1000=0.05159, 2500=0.04935, 5000=0.04486 (USD)", RoHS=No, Stock 1=11336, Supplier 1=Digi-Key
C26 C27 C30 C31 C32 C35 C36 C43: library part Capacitor, "Cap Ceramic 10uF 10V X5R 10% SMD 0805 85C Embossed T/R", Case Code (Imperial)=0805, Case Code (Metric)=2012, Dielectric=X5R, Manufacturer 1=Samsung, Manufacturer Part Number 1=CL21A106KPFNNNG, Max Operating Temperature=85°C, Min Operating Temperature=-55°C, Package Quantity=3000, Supplier Part Number 1=1276-6456-1-ND, Tolerance=10%, Voltage=10V, Capacitance=10uF, Case/Package=0805, Category="Ceramic Capacitors", ComponentLink1Description=https://datasheet.ciiva.com/16428/cl21a106kpfnnng-16428896.pdf?src-supplier=Future+Electronics, ComponentLink1URL=https://datasheet.ciiva.com/16428/cl21a106kpfnnng-16428896.pdf?src-supplier=Future+Electronics, ComponentLink2Description=https://datasheet.ciiva.com/26936/getdatasheetpartid-640497-26936900.pdf?src-supplier=Verical, ComponentLink2URL=https://datasheet.ciiva.com/26936/getdatasheetpartid-640497-26936900.pdf?src-supplier=Verical, Depth=1.25mm, Height=1.25mm, Lead Free="Lead Free", Length=2mm, Mount="Surface Mount", Packaging="Tape and Reel", Pricing 1="1=0.13000, 10=0.09100, 100=0.04300, 500=0.03016, 1000=0.02497 (USD)", Radiation Hardening=No, RoHS=Yes, Stock 1=443468, Supplier 1=Digi-Key, Termination=Wraparound, Thickness=0.053inch, Voltage Rating=10V, Width=0.049inch
C28 C29 C33 C34 C37 C39 C41 C44 C46 C48 C50 C53 C54: library part Capacitor, "Cap Ceramic 0.1uF 10V X5R 20% Pad SMD 0402 85C T/R", Case Code (Imperial)=0402, Case Code (Metric)=1005, Dielectric=X5R, Manufacturer 1=Samsung, Manufacturer Part Number 1=CL05A104MP5NNNC, Max Operating Temperature=85°C, Min Operating Temperature=-55°C, Supplier Part Number 1=1276-1443-1-ND, Tolerance=20%, Voltage Rating=10V, Capacitance=100nF, Case/Package=0402, Category="Ceramic Capacitors", ComponentLink1Description=https://datasheet.ciiva.com/25709/cl05a104mp5nnnc-25709105.pdf?src-supplier=Digi-Key, ComponentLink1URL=https://datasheet.ciiva.com/25709/cl05a104mp5nnnc-25709105.pdf?src-supplier=Digi-Key, Depth=0.5mm, Height=0.5mm, Lead Free="Lead Free", Length=1mm, Mount="Surface Mount", Packaging="Tape and Reel", Pricing 1="1=0.10000, 10=0.01900, 100=0.00830, 500=0.00592, 1000=0.00465, 2500=0.00422, 5000=0.00389 (USD)", Radiation Hardening=No, RoHS=Yes, Stock 1=4686080, Supplier 1=Digi-Key, Thickness=0.022inch, Voltage Rating (DC)=10V, Width=0.02inch
C51 C52: library part Capacitor, "CAP CER 18PF 50V C0G/NPO 0402", Case Code (Imperial)=0402, Case Code (Metric)=1005, Dielectric=C0G, Manufacturer 1=Yageo, Manufacturer Part Number 1=CC0402JRNPO9BN180, Max Operating Temperature=125°C, Min Operating Temperature=-55°C, Package Quantity=1, Supplier Part Number 1=311-1415-1-ND, Temperature Coefficient=30ppm/°C, Tolerance=5%, Voltage=50V, Capacitance=18pF, Case/Package=0402, Category="Ceramic Capacitors", ComponentLink1Description=https://datasheet.ciiva.com/11788/0900766b80d84fbf-11788369.pdf?src-supplier=RSComponents, ComponentLink1URL=https://datasheet.ciiva.com/11788/0900766b80d84fbf-11788369.pdf?src-supplier=RSComponents, ComponentLink2Description=https://datasheet.ciiva.com/176/mlccorderingcode-176357.pdf?src-supplier=Digi-Key, ComponentLink2URL=https://datasheet.ciiva.com/176/mlccorderingcode-176357.pdf?src-supplier=Digi-Key, ComponentLink3Description=https://datasheet.ciiva.com/176/mlccorderingcode-176358.pdf?src-supplier=Digi-Key, ComponentLink3URL=https://datasheet.ciiva.com/176/mlccorderingcode-176358.pdf?src-supplier=Digi-Key, ComponentLink4Description=https://datasheet.ciiva.com/176/mlccorderingcode-176359.pdf?src-supplier=Digi-Key, ComponentLink4URL=https://datasheet.ciiva.com/176/mlccorderingcode-176359.pdf?src-supplier=Digi-Key, ComponentLink5Description=https://datasheet.ciiva.com/28450/1443161-28450232.pdf?src-supplier=Element14, ComponentLink5URL=https://datasheet.ciiva.com/28450/1443161-28450232.pdf?src-supplier=Element14, ComponentLink6Description=https://datasheet.ciiva.com/13208/upy-gp-np0-16v-to-50v-8-13208430.pdf?src-supplier=Mouser, ComponentLink6URL=https://datasheet.ciiva.com/13208/upy-gp-np0-16v-to-50v-8-13208430.pdf?src-supplier=Mouser, ComponentLink7Description=https://datasheet.ciiva.com/11587/upy-gp-np0-16v-to-50v-8-11587087.pdf?src-supplier=Avnet, ComponentLink7URL=https://datasheet.ciiva.com/11587/upy-gp-np0-16v-to-50v-8-11587087.pdf?src-supplier=Avnet, Composition=Ceramic, Depth=0.5mm, Height=0.5mm, Lead Free="Lead Free", Length=1mm, Mount="Surface Mount", Number of Pins=2, Packaging="Tape and Reel", Pricing 1="1=0.10000, 10=0.02300, 100=0.01030, 500=0.00736, 1000=0.00578, 2500=0.00525, 5000=0.00483 (USD)", Radiation Hardening=No, REACH SVHC="No SVHC", RoHS=Yes, Stock 1=739848, Supplier 1=Digi-Key, Termination=SMD/SMT, Thickness=0.022inch, Voltage Rating=50V, Voltage Rating (DC)=50V, Weight=2.3E-05oz, Width=0.02inch
D1: library part Diode, "DIODE SCHOTTKY 20V 1A SOD123F", Average Rectified Current=1A, Manufacturer 1="ON Semiconductor / Fairchild", Max Forward Surge Current (Ifsm)=45A, Max Repetitive Reverse Voltage (Vrrm)=20V, Supplier Part Number 1=MBR1020VLCT-ND, Category="Rectifier Diodes", ComponentLink1Description=http://www.farnell.com/datasheets/2552643.pdf?src-supplier=Farnell, ComponentLink1URL=http://www.farnell.com/datasheets/2552643.pdf?src-supplier=Farnell, ComponentLink2Description=https://www.fairchildsemi.com/datasheets/MB/MBR1020VL.pdf?src-supplier=Digi-Key, ComponentLink2URL=https://www.fairchildsemi.com/datasheets/MB/MBR1020VL.pdf?src-supplier=Digi-Key, ComponentLink3Description=http://www.farnell.com/datasheets/2552643.pdf?src-supplier=Newark, ComponentLink3URL=http://www.farnell.com/datasheets/2552643.pdf?src-supplier=Newark, Element Configuration=Single, Manufacturer Part Number 1=MBR1020VL, Max Reverse Voltage (DC)=20V, Mount="Surface Mount", Packaging="Tape and Reel", Pricing 1="1=0.41000, 10=0.30300, 100=0.17170, 500=0.11370, 1000=0.08717 (USD)", Reverse Recovery Time=12.4ns, RoHS=Yes, Stock 1=14914, Supplier 1=Digi-Key, Weight=0.0276g
D2: library part LED, "0603 green led allngap 571nm-574nm water clear 18-71mcd 130d", Case Code (Imperial)=0603, Case Code (Metric)=1608, Forward Current=30mA, Forward Voltage=2V, Lens Color=Colorless, Manufacturer 1="Vishay Lite-On", Manufacturer Part Number 1=LTST-C190KGKT, Max Operating Temperature=85°C, Min Operating Temperature=-55°C, Package Quantity=1, Power Dissipation=75mW, Reverse Voltage=5V, Supplier Part Number 1=160-1435-1-ND, Test Current=20mA, Case/Package=0603, Category=LEDs, Color=Green, ComponentLink1Description=https://datasheet.ciiva.com/15117/getdatasheetpartid-141494-15117731.pdf?src-supplier=Verical, ComponentLink1URL=https://datasheet.ciiva.com/15117/getdatasheetpartid-141494-15117731.pdf?src-supplier=Verical, ComponentLink2Description=https://datasheet.ciiva.com/12403/100-ltst-c190kgkt-63268-12403899.pdf?src-supplier=Mouser, ComponentLink2URL=https://datasheet.ciiva.com/12403/100-ltst-c190kgkt-63268-12403899.pdf?src-supplier=Mouser, ComponentLink3Description=https://datasheet.ciiva.com/11774/0900766b80dc02a8-11774060.pdf?src-supplier=RSComponents, ComponentLink3URL=https://datasheet.ciiva.com/11774/0900766b80dc02a8-11774060.pdf?src-supplier=RSComponents, ComponentLink4Description=https://datasheet.ciiva.com/2109/s-110-ltst-c190kgkt-2109988.pdf?src-supplier=Digi-Key, ComponentLink4URL=https://datasheet.ciiva.com/2109/s-110-ltst-c190kgkt-2109988.pdf?src-supplier=Digi-Key, ComponentLink5Description=https://datasheet.ciiva.com/2109/s-110-ltst-c190kgkt-2109989.pdf?src-supplier=Digi-Key, ComponentLink5URL=https://datasheet.ciiva.com/2109/s-110-ltst-c190kgkt-2109989.pdf?src-supplier=Digi-Key, ComponentLink6Description=https://datasheet.ciiva.com/2109/s-110-ltst-c190kgkt-2109990.pdf?src-supplier=Digi-Key, ComponentLink6URL=https://datasheet.ciiva.com/2109/s-110-ltst-c190kgkt-2109990.pdf?src-supplier=Digi-Key, Depth=0.8mm, Dominant Wavelength=571nm, Height=0.8mm, Illumination Color=Green, Lead Free="Lead Free", Length=1.6mm, Lens Style=Diffused,Colorless,Rectangular,Clear, Lens Transparency=Clear, Luminous Intensity=35mcd, Mount="Surface Mount", Number of Elements=1, Number of LEDs=1, Number of Pins=2, Packaging="Tape and Reel", Power Rating=75mW, Pricing 1="1=0.26000, 10=0.18800, 100=0.08880, 500=0.05922, 1000=0.04639 (USD)", Radiation Hardening=No, RoHS=Yes, Stock 1=642633, Supplier 1=Digi-Key, Viewing Angle=130°, Wavelength=574nm, Width=0.8mm
D3: library part LED, "LED Uni-Color Blue 468nm 2-Pin Chip 0603(1608Metric) T/R", Manufacturer 1=Everlight, Manufacturer Part Number 1=19-213SUBC/S400-A5/S208-2/TR8, Supplier Part Number 1=1080-1581-1-ND, ComponentLink1Description=https://media.digikey.com/pdf/Data%20Sheets/Everlight%20PDFs/19-213SUBC-S400-A5-S208-2-TR8.pdf?src-supplier=Digi-Key, ComponentLink1URL=https://media.digikey.com/pdf/Data%20Sheets/Everlight%20PDFs/19-213SUBC-S400-A5-S208-2-TR8.pdf?src-supplier=Digi-Key, Pricing 1="1=0.34000, 10=0.24900, 100=0.11810, 500=0.07876, 1000=0.06169, 2500=0.06038, 5000=0.05250 (USD)", Stock 1=47392, Supplier 1=Digi-Key
D4: library part LED, "LED RED DIFFUSED 1608 SMD", Case Code (Imperial)=0603, Case Code (Metric)=1608, Forward Voltage=2.2V, Lens Color=White, Manufacturer 1=Rohm, Manufacturer Part Number 1=SML-D12U1WT86, Supplier Part Number 1=SML-D12U1WT86CT-ND, Test Current=20mA, Case/Package=0603, Category=LEDs, Color=Red, ComponentLink1Description=https://www.rohm.com/datasheet/SML-D12U1W?src-supplier=Digi-Key, ComponentLink1URL=https://www.rohm.com/datasheet/SML-D12U1W?src-supplier=Digi-Key, Dominant Wavelength=620nm, Height=0.65mm, Lead Free="Lead Free", Length=1.6mm, Lens Transparency=Diffused, Luminous Intensity=63mcd, Mount="Surface Mount", Packaging="Tape and Reel", Pricing 1="1=0.21000, 10=0.15500, 100=0.07330, 500=0.04884, 1000=0.03826 (USD)", RoHS=Yes, Stock 1=96413, Supplier 1=Digi-Key, Width=0.8mm
F1: library part "SCH - RF - FILTER - MINICIRCUITS LFCN-490", "490MHz Low Pass Filter"